# Altium PCB mainPCB.PcbDoc
Units mm, origin at the board's own origin, x right, y up, seen from the top; angles counter-clockwise.
Board outline 100 x 100 mm, 2 copper layers (Top Layer, Bottom Layer); 20 components, 12 nets, 83 pads, 0 vias.
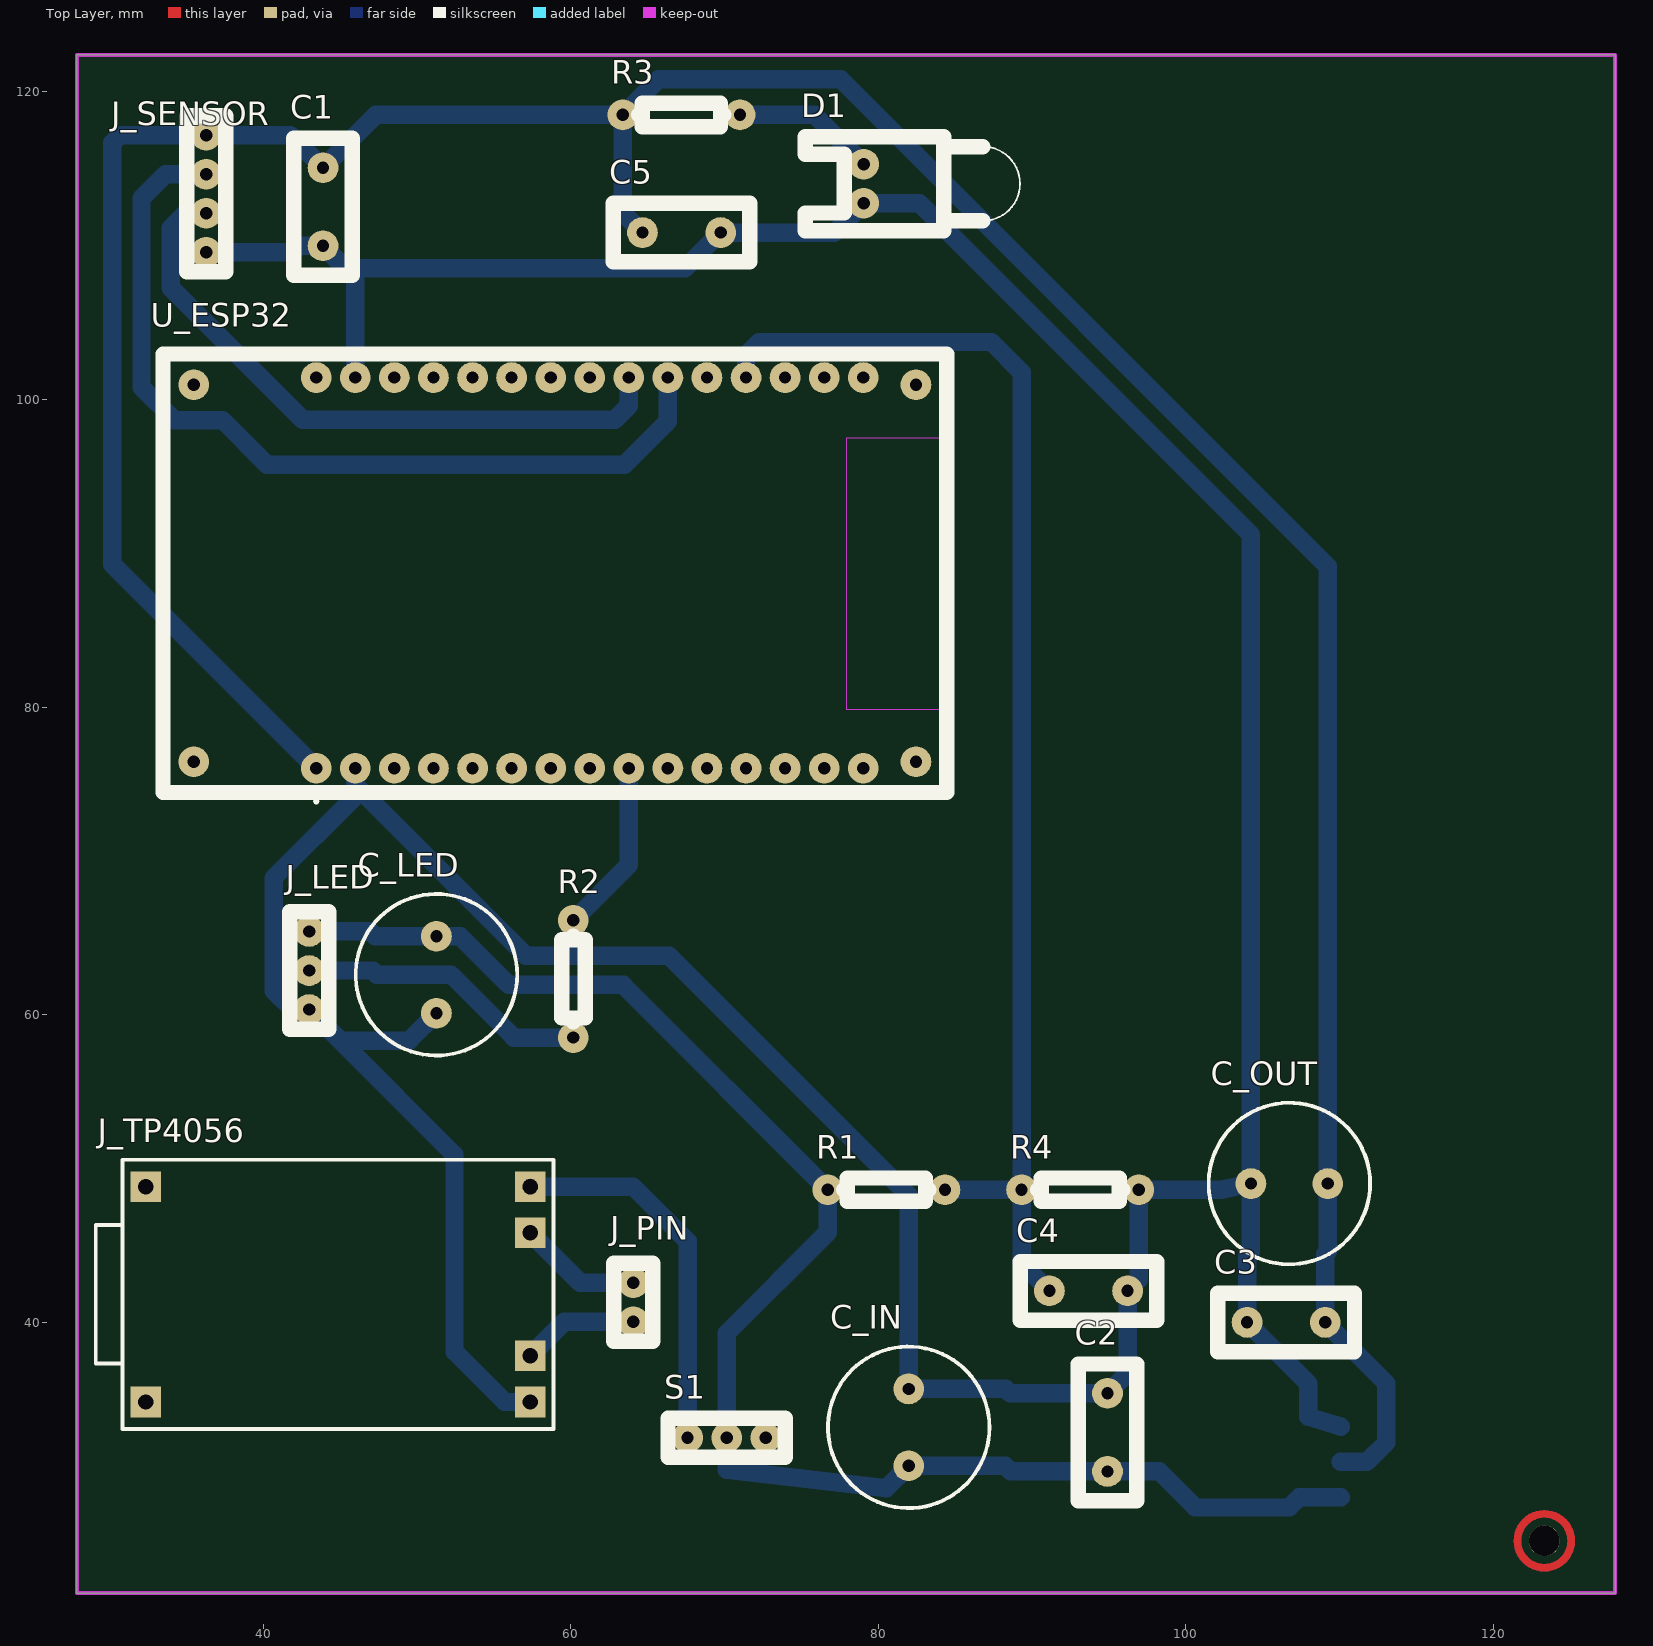
[diagram p0: Top Layer view]
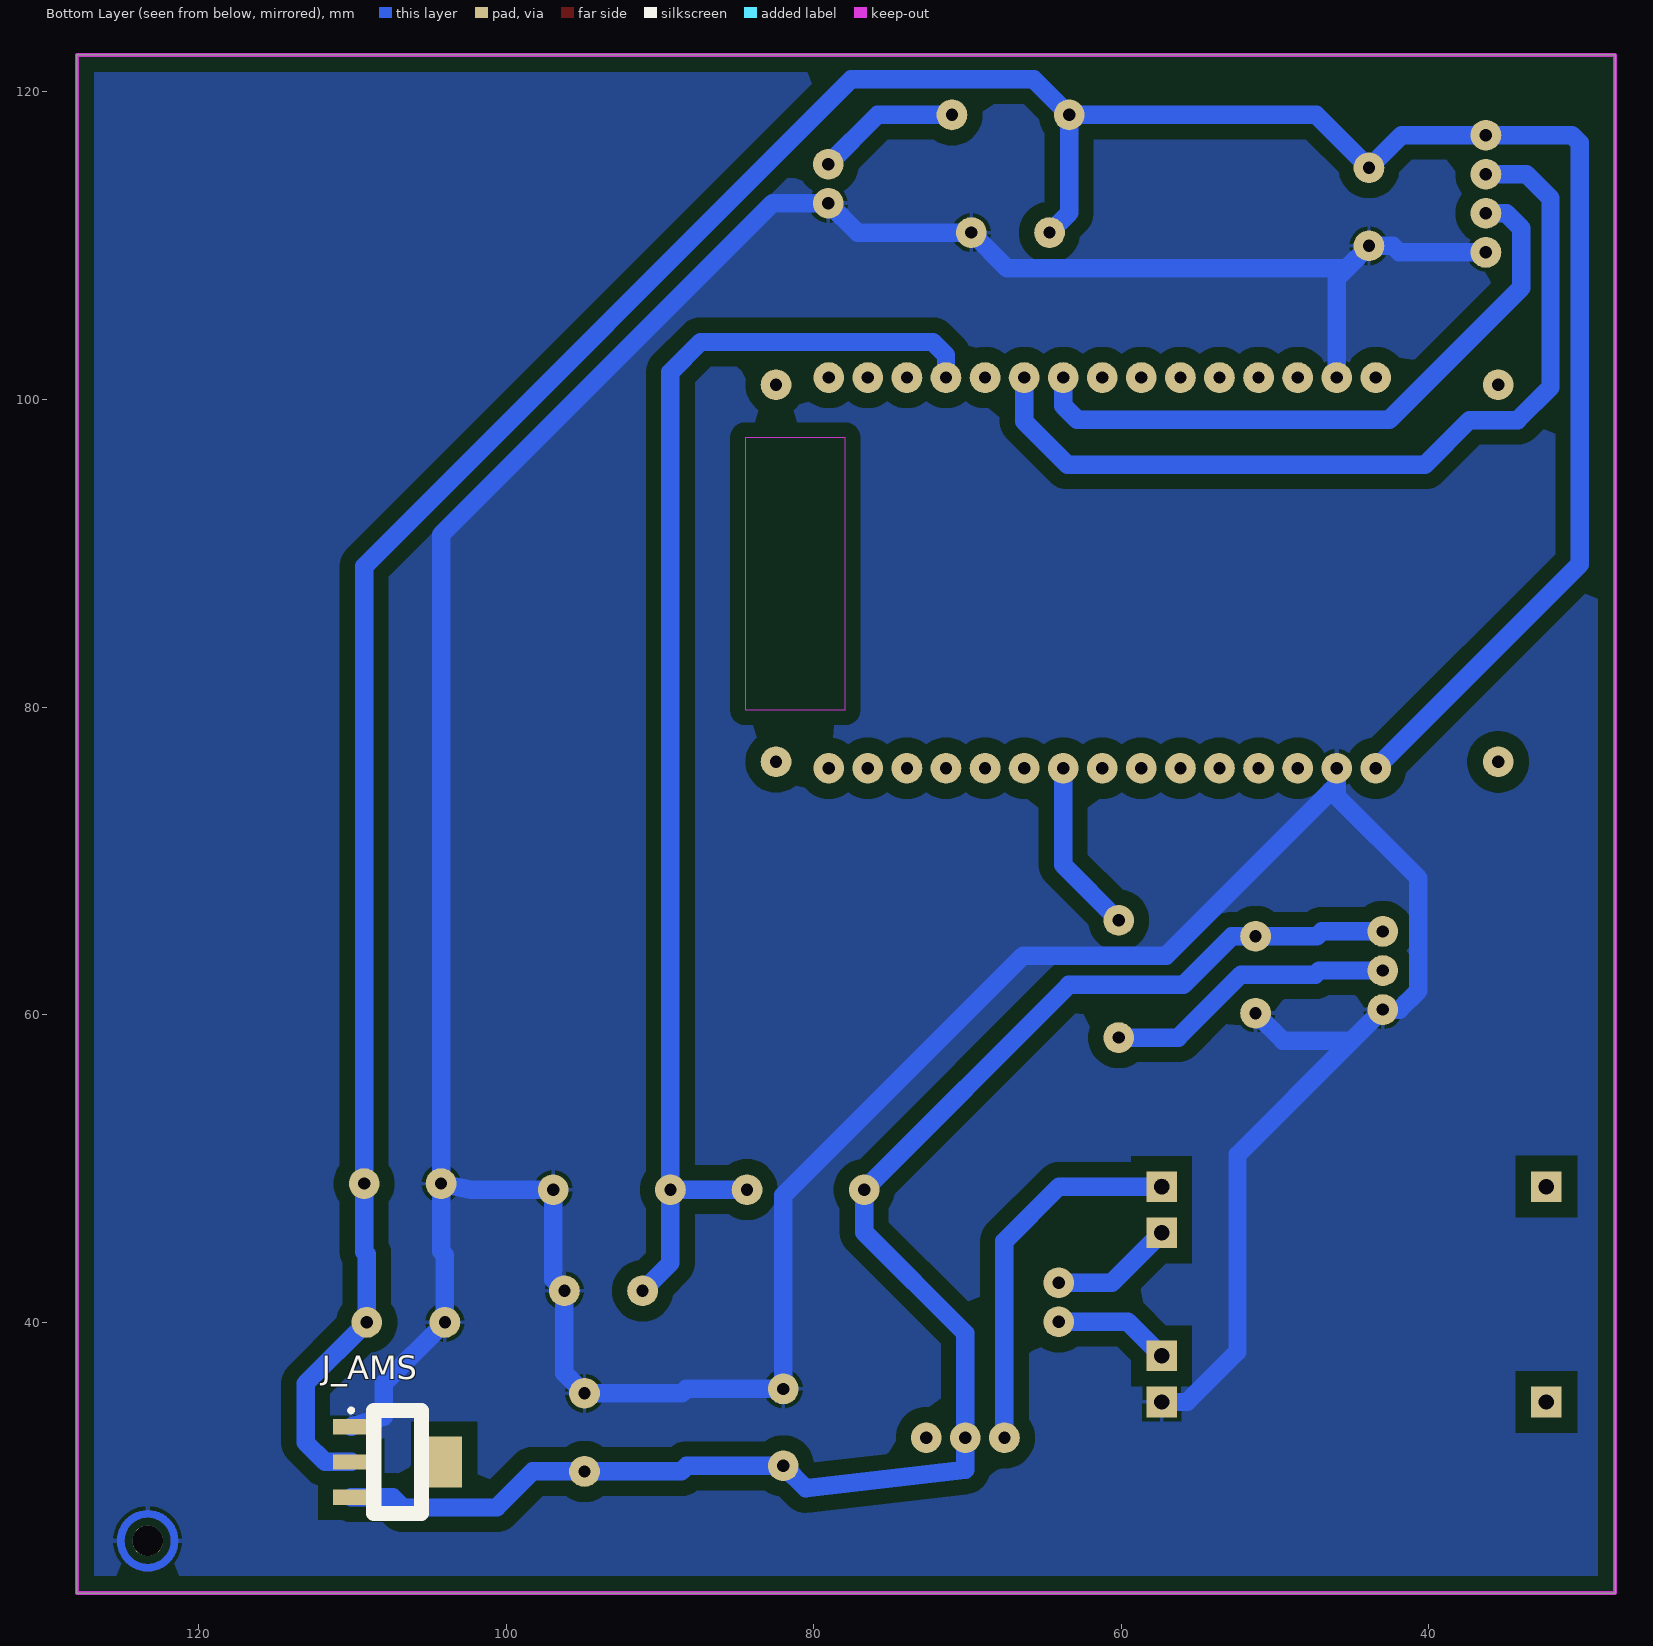
[diagram p1: Bottom Layer view, seen from below]

## Layer stack, top to bottom
Top Solder: solder mask 0.0102, Solder Resist, Dk 3.5
Top Layer: signal copper 0.0356
Dielectric 1: dielectric 0.32, FR-4, Dk 4.8
Bottom Layer: signal copper 0.0356
Bottom Solder: solder mask 0.0102, Solder Resist, Dk 3.5

## Board outline
27.9,122.4 127.9,122.4 127.9,22.4 27.9,22.4

## Design rules (kind name [scope] priority, off if disabled: settings)
Clearance [All] p1: gap=0.5 ignorepadtopadclearanceinfootprint=FALSE
PolygonConnect [All] p1: connectstyle=Relief reliefconductorwidth=0.254 reliefentries=4 polygonreliefangle="90 Angle" airgapwidth=0.254
RoutingLayers [All] p1: top layer_v5=FALSE bottom layer_v5=TRUE
RoutingVias [All] p1: holewidth=0.711 width=1.27 viastyle="Through Hole" minholewidth=0.711 minwidth=1.27 maxholewidth=0.711 maxwidth=1.27
SilkToSilkClearance [All] p1: silktosilkclearance=0
SilkToSolderMaskClearance [IsPad] p1: minsilkscreentomaskgap=0 clearancetoexposedcopper=TRUE
SolderMaskExpansion [All] p1: expansion=0 istentingtop=FALSE
SupplyNets "Schematic Supply Nets" [InNet('GND')] p1: voltage=0.000
Width [All] p1: maxlimit=1.2 minlimit=0.8 preferedwidth=1.2
27 further rules are at their usual default settings.

## Components (designator, comment, footprint, x,y, rotation, side; value= is the part's Value field where it differs from the comment)
C1 "Cap" RAD-0.2 43.9,112.525 r90 top value=100nF
C2 "Cap" RAD-0.2 94.9,32.85 r90 top value=100nF
C3 "Cap" RAD-0.2 106.515,40 r0 top value=100nF
C4 "Cap" RAD-0.2 93.665,42.05 r180 top value=100nF
C5 "Cap" RAD-0.2 67.21,110.85 r180 top value=100nF
C_IN "Cap Pol1" RB5-10.5 81.975,33.175 r90 top value=10uF
C_LED "Cap Pol1" RB5-10.5 51.275,62.6 r270 top value=100uF
C_OUT "Cap Pol1" RB5-10.5 106.725,49.025 r180 top value=100uF
D1 "LED0" LED-0 79.05,114.025 r90 top
J_AMS "AMS1117-3.3V" SOT230P700X180-4M 107.05,30.925 r180 bottom
J_LED "Header 3" HDR1X3 43,60.335 r90 top
J_PIN "PIN_LIPO" HDR1X2 64.075,42.575 r270 top
J_SENSOR "HX710B" HDR1X4 36.3,117.18 r270 top
J_TP4056 "MOD_TP4056" MOD_TP4056-Footprint-1 44.875,41.825 r90 top
R1 "Res2" AXIAL-0.3 80.525,48.625 r180 top value=100K
R2 "Res2" AXIAL-0.3 60.175,62.325 r90 top value=330
R3 "Res2" AXIAL-0.3 67.2,118.5 r180 top value=1K
R4 "Res2" AXIAL-0.3 93.125,48.625 r180 top value=100K
S1 "SW-SPDT" HDR1X3 72.68,32.5 r180 top
U_ESP32 "ESP32-DEVKIT-V1" MODULE_ESP32_DEVKIT_V1 58.975,88.725 r90 top

## Footprints (in the part's own frame and the unit in brackets; to place one, negate y for a bottom-side part, rotate by r counter-clockwise, add the part's x,y. Pads: shape width x height; smd on the part's side, far side on the other; paste and mask are expansions set on the pad)
AXIAL-0.3 [mm] "Axial Device, Thru-Hole; 2 Leads; 0.3 in Pin Spacing"
  round 2 hole 0.8: 1(-3.81,0) 2(3.81,0)
  silkscreen extent -2.77,-0.76 2.77,0.76
HDR1X2 [mm] "Connector; Header; 2 Position"
  round 2 hole 0.8: 1(0,0) 2(2.54,0)
  silkscreen extent -1.27,-1.27 3.81,1.27
HDR1X3 [mm] "Connector; Header; 3 Position"
  round 2 hole 0.8: 1(0,0) 2(2.54,0) 3(5.08,0)
  silkscreen extent -1.27,-1.27 6.35,1.27
HDR1X4 [mm] "Connector; Header; 4 Position"
  round 2 hole 0.8: 1(0,0) 2(2.54,0) 3(5.08,0) 4(7.62,0)
  silkscreen extent -1.27,-1.27 8.89,1.27
LED-0 [mm] "LED; 2 Leads"
  round 2 hole 0.8: 1(1.27,0) 2(-1.27,0)
  silkscreen extent -3.05,-10.16 3.05,3.81
MOD_TP4056-Footprint-1 [mm]
  rect 2x2 hole 1: 1(-7,12.5) 2(7,12.5) 3(-7,-12.5) 4(-4,-12.5) 5(4,-12.5)
  rect 2x2 hole 1 paste-2539.97: 6(7,-12.5)
  silkscreen extent -8.75,-14 8.75,15.75
MODULE_ESP32_DEVKIT_V1 [mm]
  round 2 hole 0.8: 1(-12.7,15.515) 2(-12.7,12.975) 3(-12.7,10.435) 4(-12.7,7.895) 5(-12.7,5.355) 6(-12.7,2.815) 7(-12.7,0.275) 8(-12.7,-2.265) 9(-12.7,-4.805) 10(-12.7,-7.345) 11(-12.7,-9.885) 12(-12.7,-12.425) 13(-12.7,-14.965) 14(-12.7,-17.505) 15(-12.7,-20.045) 16(12.7,-20.045) 17(12.7,-17.505) 18(12.7,-14.965) 19(12.7,-12.425) 20(12.7,-9.885) 21(12.7,-7.345) 22(12.7,-4.805) 23(12.7,-2.265) 24(12.7,0.275) 25(12.7,2.815) 26(12.7,5.355) 27(12.7,7.895) 28(12.7,10.435) 29(12.7,12.975) 30(12.7,15.515)
  round 2 hole 0.8 unplated: ""(-12.28,23.475) ""(-12.28,-23.475) ""(12.23,23.475) ""(12.23,-23.475)
  Keep-Out Layer region: 8.78,-25.475 -8.91,-25.475 -8.91,-18.985 8.78,-18.985
  Keep-Out Layer region: 8.78,-25.475 -8.91,-25.475 -8.91,-18.985 8.78,-18.985
  silkscreen extent -14.95,-25.48 14.23,25.47, body extent -14.1,-25.9 14.1,26.55, height 7.05
RAD-0.2 [mm] "Radial Cap, Thru-Hole; 2 Leads; 0.2 in Pin Spacing"
  round 2 hole 0.8: 1(-2.54,0) 2(2.54,0)
  silkscreen extent -4.44,-1.91 4.45,1.9
RB5-10.5 [mm] "Capacitor (Radial); 2 Leads"
  round 2 hole 0.8: 1(-2.5,0) 2(2.5,0)
  silkscreen extent -5.25,-5.25 5.25,5.25
SOT230P700X180-4M [mm] "SOT223, 4-Leads, Body 6.50x7.00mm (avg), Pitch 2.30mm, IPC Low Density"
  rect 2.35x1 smd: 1(-3.025,2.3) 2(-3.025,0) 3(-3.025,-2.3)
  rect 2.35x3.3 smd: 4(3.025,0)
  silkscreen extent -3.15,-3.35 1.55,3.47, body extent -1.85,-3.35 1.85,3.35, height 1.8

## Part data
C1 C2 C3 C4 C5: "Capacitor", LatestRevisionDate=17-Jul-2002, LatestRevisionNote="Re-released for DXP Platform.", PackageDescription="Radial Cap, Thru-Hole; 2 Leads; 0.3 in Pin Spacing", PackageReference=RAD-0.3, Published=8-Jun-2000, Publisher="Altium Limited"
C_IN C_LED C_OUT: "Polarized Capacitor (Radial)", LatestRevisionDate=17-Jul-2002, LatestRevisionNote="Re-released for DXP Platform.", PackageDescription="Polarized Capacitor (Radial); 2 Leads", PackageReference=RB7.6-15, Published=8-Jun-2000, Publisher="Altium Limited"
D1: "Typical INFRARED GaAs LED", LatestRevisionDate=08-Jul-2005, LatestRevisionNote="Mech Layer 1 removed.", PackageDescription="LED; 2 Leads", PackageReference=LED-0, Published=8-Jun-2000, Publisher="Altium Limited"
J_AMS: library part CMP-019-00050-1, "1A Fixed 3.3V 18V SOT-223 Voltage Regulators - Linear, Low Drop Out (LDO) Regulators ROHS"
J_LED: "Header, 3-Pin", LatestRevisionDate=17-Jul-2002, LatestRevisionNote="Re-released for DXP Platform.", Publisher="Altium Limited"
J_PIN: library part "Header 2", "Header, 2-Pin", LatestRevisionDate=17-Jul-2002, LatestRevisionNote="Re-released for DXP Platform.", Publisher="Altium Limited"
J_SENSOR: library part "Header 4", "Header, 4-Pin", LatestRevisionDate=17-Jul-2002, LatestRevisionNote="Re-released for DXP Platform.", Publisher="Altium Limited"
J_TP4056: library part CMP-00029-00001-4
R1 R2 R3 R4: "Resistor", LatestRevisionDate=17-Jul-2002, LatestRevisionNote="Re-released for DXP Platform.", PackageDescription="Axial Device, Thru-Hole; 2 Leads; 0.4 in Pin Spacing", PackageReference=AXIAL-0.4, Published=8-Jun-2000, Publisher="Altium Limited"
S1: "SPDT Subminiature Toggle Switch, Right Angle Mounting, Vertical Actuation", ComponentLink1Description="Manufacturer Link", ComponentLink1URL=http://www.apem.com, DatasheetVersion=05-Dec-2000, LatestRevisionDate=17-Dec-2003, LatestRevisionNote="Schematic revised, PCB Footprint replaced.", PackageDescription="Switch; 4 Leads", PackageReference=TL36WW15050, Published=24-Mar-1999, Publisher="Altium Limited"
U_ESP32: "Dual core, Wi-Fi: 2.4 GHz up to 150 Mbits/s,BLE (Bluetooth Low Energy) and legacy Bluetooth, 32 bits, Up to 240 MHz", Package=None, Check_prices=https://www.snapeda.com/parts/ESP32-DEVKIT-V1/Do+it/view-part/?ref=eda, MF="Do it", MP=ESP32-DEVKIT-V1, SnapEDA_Link=https://www.snapeda.com/parts/ESP32-DEVKIT-V1/Do+it/view-part/?ref=snap

## Free pads (board coordinates)
  round 2 hole 2: 4(123.3,25.8)

## Nets (pads, with @x,y where several pads share a name; then routed paths per layer and width w, separated by ;. In a path a pad name is that pad's centre, name@x,y a point inside that pad or via, vN(x,y) a via of type N, cw(c..) or ccw(c..) an arc to the next point about the centre after c; other vN are vias at no path point)
GND: C1.1 C2.2 C3.1 C4.1 C5.1 C_IN.2 C_LED.2 C_OUT.2 D1.2 J_AMS.1 J_LED.1 J_SENSOR.4 J_TP4056.3 pad.4 R4.1 U_ESP32.2 U_ESP32.29 | length 323
  Top Layer w0.5: 125.05,25.8 ccw(c123.3,25.8) 125.05,25.8
  Bottom Layer w0.5: 125.05,25.8 ccw(c123.3,25.8) 125.05,25.8
  Bottom Layer w1.2: J_SENSOR.4 41.924,109.56 42.349,109.985 C1.1 45.351,108.534 ; U_ESP32.2 46,74.929 ; U_ESP32.29 46,107.885 45.351,108.534 ; C_LED.2 49.493,58.317 45.018,58.317 ; J_TP4056.3 55.723,34.825 52.448,38.1 52.448,50.887 45.018,58.317 ; J_AMS.1 107.95,33.86 107.95,36.025 C3.1 103.975,44.374 104.225,44.624 C_OUT.2 ; 45.018,58.317 J_LED.1 41.91,60.335 40.691,61.554 40.691,68.885 46,74.194 46,74.929 ; 45.351,108.534 67.434,108.534 C5.1 77.145,110.85 D1.2 82.673,112.755 104.225,91.203 C_OUT.2 ; 46,74.929 57.094,63.835 66.391,63.835 81.975,48.251 C_IN.2 88.29,35.675 88.575,35.39 C2.2 96.205,36.695 C4.1 96.935,42.78 R4.1 102.299,48.625 C_OUT.2
NetC1_2: C1.2 C3.2 C5.2 C_OUT.1 J_AMS.2 J_SENSOR.1 R3.2 U_ESP32.1 | length 212.1
  Bottom Layer w1.2: U_ESP32.1 30.2,89.285 30.2,116.677 30.703,117.18 J_SENSOR.1 41.785,117.18 C1.2 47.335,118.5 R3.2 ; C5.2 63.39,112.13 R3.2 ; J_AMS.2 111.76,30.925 113.03,32.195 113.03,36.025 C3.2 109.055,44.425 109.225,44.595 C_OUT.1 109.225,89.149 77.572,120.802 65.692,120.802 R3.2
NetC2_1: C2.1 C_IN.1 C_LED.1 J_AMS.3 J_LED.3 R1.2 S1.2 | length 103.6
  Bottom Layer w1.2: J_LED.3 46.965,65.415 47.28,65.1 C_LED.1 52.81,65.1 55.975,61.935 63.405,61.935 R1.2 76.715,45.854 70.14,39.279 S1.2 70.14,30.427 80.51,29.21 C_IN.1 88.24,30.675 88.605,30.31 C2.1 98.273,30.31 100.617,27.965 106.705,27.965 107.365,28.625 J_AMS.3
NetC4_2: C4.2 R1.1 R4.2 U_ESP32.19 | length 86
  Bottom Layer w1.2: U_ESP32.19 71.4,102.87 72.264,103.734 87.351,103.734 89.315,101.769 R4.2 ; R1.1 R4.2 ; C4.2 89.315,43.86 R4.2
NetD1_1: D1.1 R3.1 | length 9.4
  Bottom Layer w1.2: R3.1 75.845,118.5 D1.1
NetJ_LED_2: J_LED.2 R2.1 | length 19
  Bottom Layer w1.2: J_LED.2 47.142,62.875 47.406,62.611 52.216,62.611 56.312,58.515 R2.1
NetJ_PIN_1: J_PIN.1 J_TP4056.5 | length 8
  Bottom Layer w1.2: J_TP4056.5 60.625,42.575 J_PIN.1
NetJ_PIN_2: J_PIN.2 J_TP4056.4 | length 7.6
  Bottom Layer w1.2: J_TP4056.4 59.585,40.035 J_PIN.2
NetJ_SENSOR_2: J_SENSOR.2 U_ESP32.21 | length 57.4
  Bottom Layer w1.2: J_SENSOR.2 33.665,114.64 32.1,113.075 32.1,100.795 34.24,98.655 37.362,98.655 40.259,95.758 63.5,95.758 66.32,98.578 U_ESP32.21
NetJ_SENSOR_3: J_SENSOR.3 U_ESP32.22 | length 42.1
  Bottom Layer w1.2: J_SENSOR.3 34.975,112.1 34,111.125 34,107.264 42.585,98.679 62.865,98.679 63.78,99.594 U_ESP32.22
NetJ_TP4056_6: J_TP4056.6 S1.3 | length 24.5
  Bottom Layer w1.2: J_TP4056.6 64.046,48.825 67.6,45.271 S1.3
NetR2_2: R2.2 U_ESP32.9 | length 11.4
  Bottom Layer w1.2: R2.2 63.78,69.74 U_ESP32.9
pads on no net: J_AMS.4 J_TP4056.1 J_TP4056.2 S1.1 U_ESP32. U_ESP32.3 U_ESP32.4 U_ESP32.5 U_ESP32.6 U_ESP32.7 U_ESP32.8 U_ESP32.10 U_ESP32.11 U_ESP32.12 U_ESP32.13 U_ESP32.14 U_ESP32.15 U_ESP32.16 U_ESP32.17 U_ESP32.18 U_ESP32.20 U_ESP32.23 U_ESP32.24 U_ESP32.25 U_ESP32.26 U_ESP32.27 U_ESP32.28 U_ESP32.30

## Polygon pours and split planes (outlines as drawn)
GND on Bottom Layer "GND_L02_P000" (solid, remove dead copper, pour order 0): 27.9,122.4 127.9,122.4 127.9,22.4 27.9,22.4

## Keep-outs
Keep-Out Layer:
  lines w0.254: 127.9,118.2 127.9,119.4 ; 27.9,22.4 27.9,122.4 127.9,122.4 127.9,22.4 27.9,22.4